# Altium PCB PCB1.PcbDoc
Units mil, origin at the board's own origin, x right, y up, seen from the top; angles counter-clockwise.
Board outline 6000 x 4000 mil, 2 copper layers (Top Layer, Bottom Layer); 17 components, 15 nets, 44 pads, 0 vias.
Unrouted connection lines stored in the file: 2.
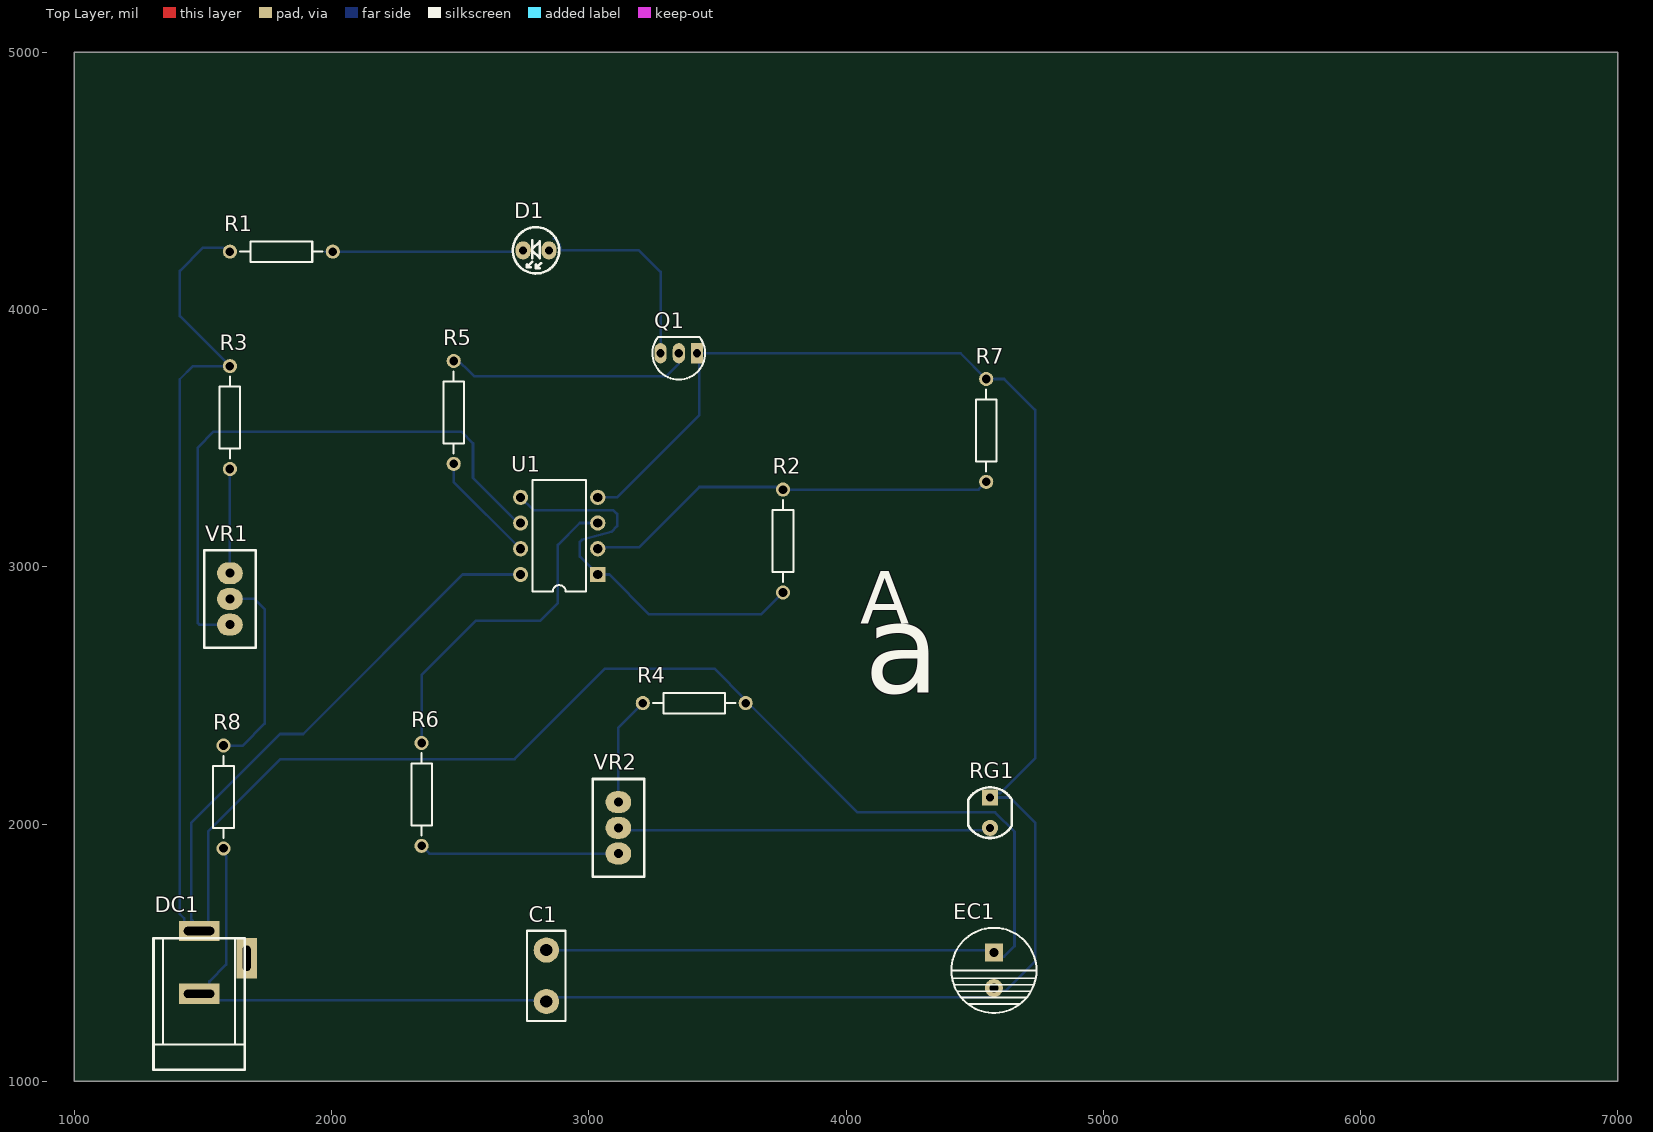
[diagram p0: Top Layer view]
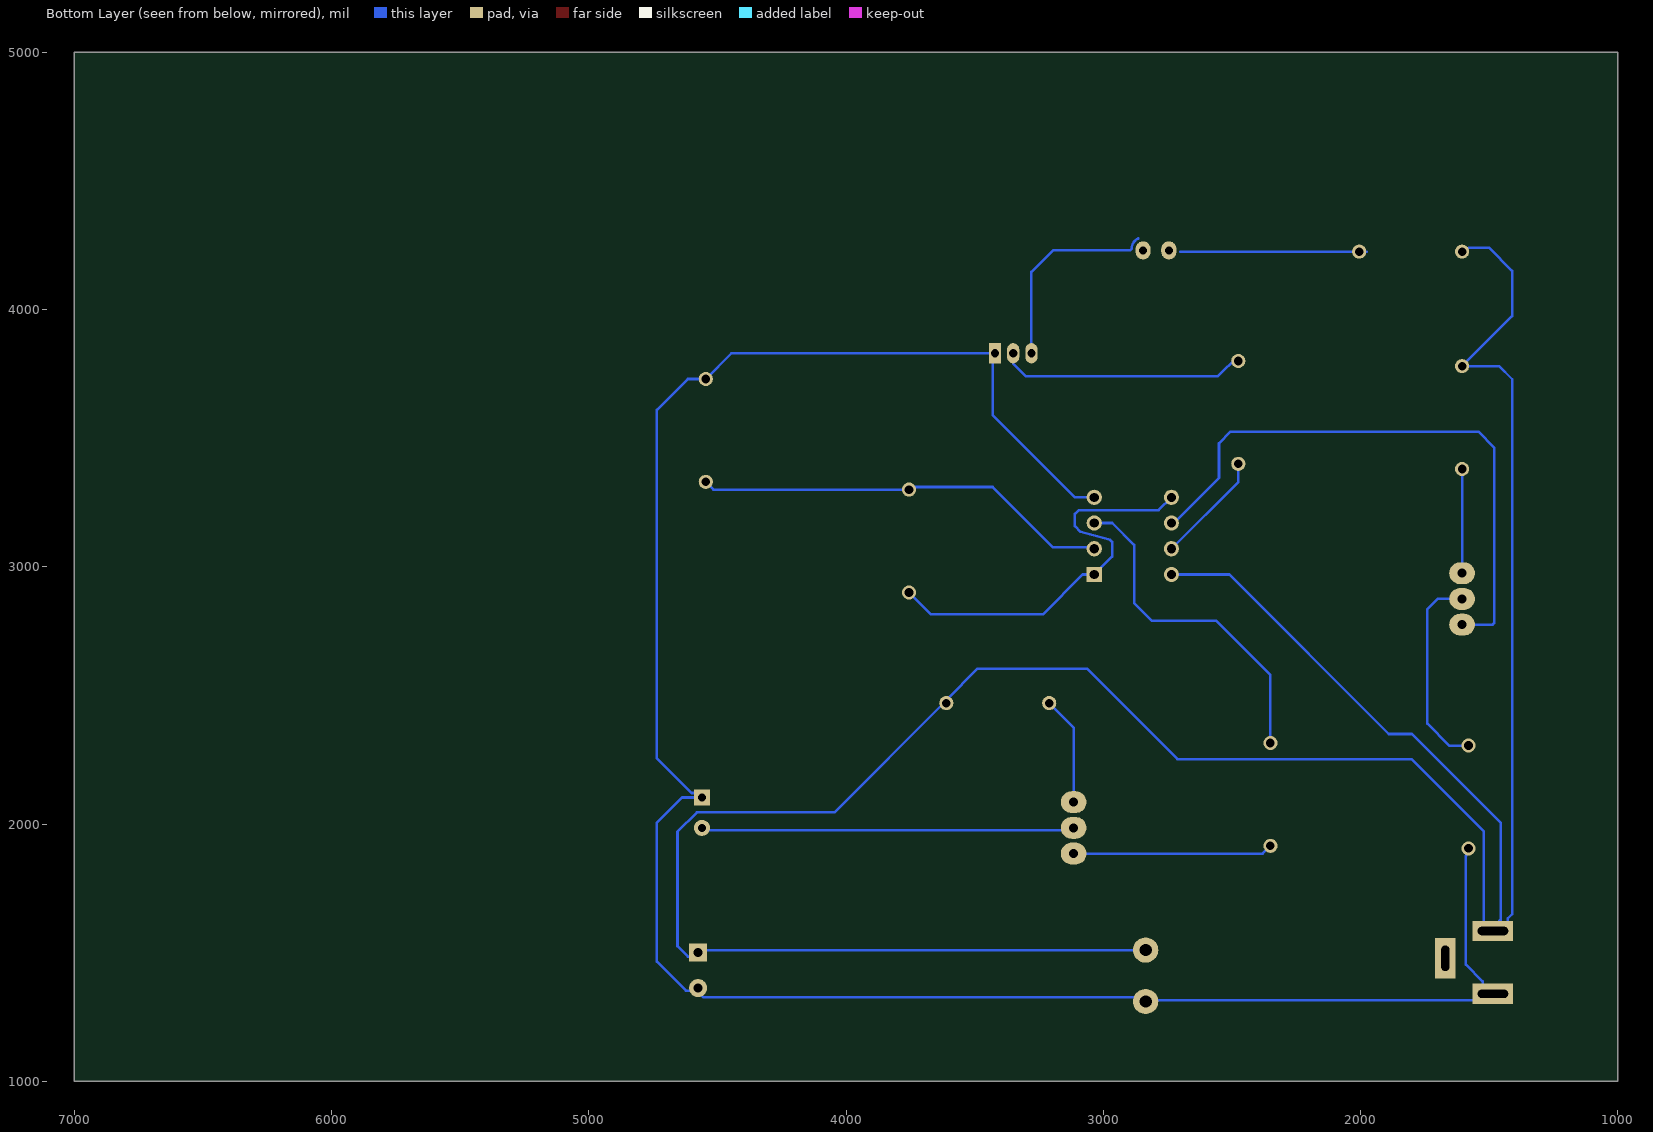
[diagram p1: Bottom Layer view, seen from below]
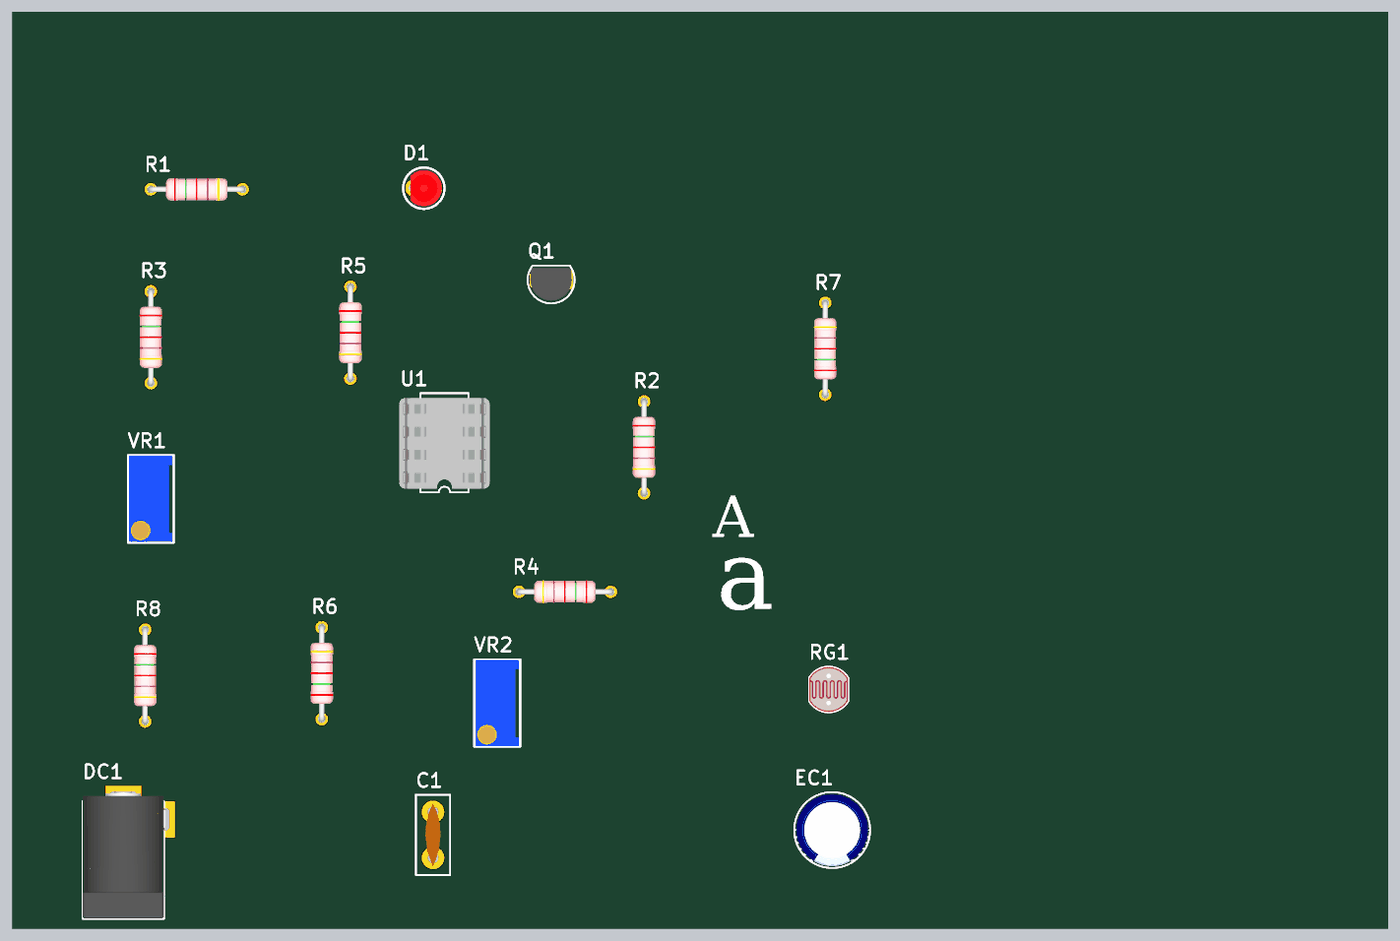
[diagram p2: 3D render of the assembled board from above, using the file's embedded part models]

## Layer stack, top to bottom
Top Solder: solder mask 0.4, Solder Resist, Dk 3.5
Top Layer: signal copper 1.4
Dielectric 1: dielectric 12.6, FR-4, Dk 4.8
Bottom Layer: signal copper 1.4
Bottom Solder: solder mask 0.4, Solder Resist, Dk 3.5

## Board outline
1000,1000 7000,1000 7000,5000 1000,5000

## Design rules (kind name [scope] priority, off if disabled: settings)
Clearance [All] p1: gap=10 ignorepadtopadclearanceinfootprint=FALSE except(0: Arc-Hole Track-Hole SMDPad-Hole THPad-Hole Via-Hole Fill-Hole Poly-Hole Region-Hole Text-Hole)
PolygonConnect [All] p1: connectstyle=Relief reliefconductorwidth=10 reliefentries=4 polygonreliefangle="90 Angle" airgapwidth=10
RoutingLayers RoutingLayers_1 [All] p1: top layer_v5=TRUE bottom layer_v5=TRUE
RoutingLayers RoutingOnly [All] p2: top layer_v5=FALSE bottom layer_v5=TRUE
RoutingVias [All] p1: holewidth=28 width=50 viastyle="Through Hole" minholewidth=28 minwidth=50 maxholewidth=28 maxwidth=50
SolderMaskExpansion [All] p1: expansion=4 istentingtop=FALSE
Width [All] p1: maxlimit=10 minlimit=10 preferedwidth=10
29 further rules are at their usual default settings.

## Components (designator, comment, footprint, x,y, rotation, side; value= is the part's Value field where it differs from the comment)
C1 "100nF" RAD-0.2 2835,1310 r90 top
D1 "LED-3528" LED3-RED 2845,4230 r180 top
DC1 "DC_Socket" DC-005 1485,1584.09 r270 top
EC1 "220uF/25V" DIP-EC3.5X8X11.5 4575,1500 r270 top
Q1 "S8050" TO-92A 3420.87,3830 r180 top
R1 "1K" AXIAL0.4 2135,4265 r180 top
R2 "10K" AXIAL0.4 3795,2770 r90 top
R3 "1K" AXIAL0.4 1645,3250 r90 top
R4 "1K" AXIAL0.4 3080,2430 r0 top
R5 "1K" AXIAL0.4 2515,3270 r90 top
R6 "10K" AXIAL0.4 2310,2445 r270 top
R7 "5.1K" AXIAL0.4 4505,3860 r270 top
R8 "1K" AXIAL0.4 1620,1775 r90 top
RG1 "5506" Photoresistor 4560,2103.11 r270 top
U1 "LM358P" P008 2885,3120 r90 top
VR1 "RESVR" 3296W 1605,2875 r270 top
VR2 "RESVR" 3296W 3115,1985 r270 top

## Footprints (in the part's own frame and the unit in brackets; to place one, negate y for a bottom-side part, rotate by r counter-clockwise, add the part's x,y. Pads: shape width x height; smd on the part's side, far side on the other; paste and mask are expansions set on the pad)
3296W [mil]
  oval 85x100 hole 35: 1(-100,0) 2(0,0) 3(100,0)
  silkscreen extent -190,-100 190,100, body extent -188,-94 188,94, height 455
AXIAL0.4 [mm] "1/4W/1/2W"
  round 1.4 hole 0.85: 1(3.302,1.016) 2(13.462,1.016)
  silkscreen extent 4.32,0 12.45,2.03, body extent 3,-0.24 13.76,2.28, height 2.63
DC-005 [mm] "5.5X2.1mm"
  rect 2x4 hole 0.8 slot 3 at 90 deg: 1(0,0) 2(6.2,0)
  rect 4x2 hole 0.8 slot 2.5 at 0 deg: 3(2.7,4.7)
  silkscreen extent 0.72,-4.5 13.7,4.5, body extent -0.4,-4.52 13.65,4.78, height 11.2
DIP-EC3.5X8X11.5 [mm]
  rect 1.8x1.8 hole 0.9: 1(0,0)
  round 1.8 hole 0.9: 2(3.5,0)
  silkscreen extent -2.45,-4.2 5.95,4.2, body extent -2.25,-4 5.75,4, height 11.53
LED3-RED [mm]
  oval 1.5x1.8 hole 0.8: A(0,0) K(2.54,0)
  silkscreen extent -1.02,-2.29 3.55,2.29, body extent -0.74,-2 2.78,1.99, height 5.2
P008 [mm] "DIP; 8 Leads; Row Spacing 7.62 mm; Pitch 2.54 mm"
  rect 1.5x1.5 hole 0.9: 1(-3.81,-3.81)
  round 1.5 hole 0.9: 2(-1.27,-3.81) 3(1.27,-3.81) 4(3.81,-3.81) 5(3.81,3.81) 6(1.27,3.81) 7(-1.27,3.81) 8(-3.81,3.81)
  silkscreen extent -5.5,-2.65 5.5,2.65, body extent -5.08,-5 4.95,5, height 5.08
Photoresistor [mm]
  rect 1.6x1.6 hole 0.8: 1(0,0)
  round 1.6 hole 0.8: 2(3,0)
  silkscreen extent -1,-2.16 4,2.16, body extent -1,-2.16 4,2.14, height 1.9
RAD-0.2 [mm]
  round 2.5 hole 1.2: 1(0,0) 2(5.08,0)
  silkscreen extent -1.91,-1.91 6.98,1.91, body extent -0.96,-0.85 6.04,0.85, height 7.06
TO-92A [mm]
  oval 1.2x2 hole 0.8: B(1.8,0) C(3.6,0)
  rect 1.2x2 hole 0.8: E(0,0)
  silkscreen extent -0.8,-1.6 4.4,2.6, body extent -0.5,-1.31 4.1,2.29, height 6.58

## Part data
C1: library part CAP, "无极性电容"
EC1: library part DIP_ECAP, "直插电解电容"
Q1: library part NPN, "NPN三极管"
R1 R2 R3 R4 R5 R6 R7 R8: library part RES
RG1: library part Photoresistor, "光敏电阻"
U1: "Dual Operational Amplifier", Code_JEDEC=MO-001-AN, ComponentLink1Description="Manufacturer Link", ComponentLink1URL=http://www.ti.com/, ComponentLink2Description=Datasheet, ComponentLink2URL=http://www-s.ti.com/sc/ds/lm358.pdf, DatasheetVersion=Jul-1998, LatestRevisionDate=04-Mar-2005, LatestRevisionNote="Stylized 3D Model Added.", PackageDescription="DIP; 8 Leads; Row Spacing 7.62 mm; Pitch 2.54 mm", PackageReference=P008, PackageVersion=Jun-1999, Published=16-Jan-2001, Publisher="Altium Limited"

## Nets (pads, with @x,y where several pads share a name; then routed paths per layer and width w, separated by ;. In a path a pad name is that pad's centre, name@x,y a point inside that pad or via, vN(x,y) a via of type N, cw(c..) or ccw(c..) an arc to the next point about the centre after c; other vN are vias at no path point)
+12V: C1.2 DC1.1 EC1.1 R1.2 R3.2 R4.2 U1.8 | length 11700
  Bottom Layer w10: DC1.1@1470,1565 DC1.1@1470,1590 ; R1.2 1592.79,4225 1577.23,4240.56 1500.56,4240.56 1410.56,4150.56 1410.56,3974.44 R3.2 1461,3780 1410,3729 1410,1650 1427.39,1632.61 1427.39,1618.46 1455.86,1590 DC1.1@1470,1590 ; U1.8 2510,2970 1890,2350 1800,2350 1455,2005 1455,1629.09 ; C1.2 4530,1510 4530.42,1509.58 4544.57,1509.58 4555.43,1498.72 4555.43,1484.58 4614.58,1484.58 4655,1525 4655,1970 4580,2045 4045,2045 3620,2470 R4.2 3610,2482.21 3488.21,2604 3064,2604 2712,2252 1802,2252 1520,1970 1520,1604.09 1500,1584.09 DC1.1@1470,1614.09 ; EC1.1@4565.43,1509.57 EC1.1 EC1.1@4577.5,1497.5 ; 1455,1629.09 DC1.1@1470,1614.09 ; 1455,1629.09 1455,1614.09 DC1.1@1470,1599.09 ; DC1.1@1470,1590 DC1.1@1470,1599.09 ; DC1.1@1470,1590 1475.91,1584.09 DC1.1 DC1.1@1470,1599.09 ; DC1.1@1470,1599.09 DC1.1@1470,1614.09
GND: C1.1 DC1.2 EC1.2 Q1.E R7.1 R8.1 RG1.1 U1.4 | length 8503
  Bottom Layer w10: R8.1 1588.63,1896.37 1588.63,1877.95 1590,1876.58 1590,1453 1525,1388 DC1.2@1525,1315 ; U1.4 3110,3270 3430,3590 3430,3820.87 Q1.E 4445,3830 R7.1 4615,3730 4735,3610 4735,2255 4600.64,2120.64 4586.5,2120.64 4583.11,2117.25 RG1.1@4583.11,2103.11 ; EC1.2@4560,1352.2 4622.2,1352.2 4735,1465 4735,2005 4636.89,2103.11 RG1.1@4583.11,2103.11 ; RG1.1 RG1.1@4583.11,2103.11 ; EC1.2@4565,1337.2 4555.1,1327.3 2852.3,1327.3 2840,1315 DC1.2@1525,1315 ; DC1.2@1500,1340 DC1.2@1525,1315 ; DC1.2@1500,1340 DC1.2 DC1.2@1500,1340 ; DC1.2@1500,1340 DC1.2@1525,1315
NetD1_A: D1.A R1.1 | length 1421
  Bottom Layer w10: 1974.91,4225 2700.47,4225 R1.1
NetD1_K: D1.K Q1.C | length 793.4
  Bottom Layer w10: 2863.83,4276.26 cw(c2845,4235.91) 2889.53,4235.7 2892.3,4232.93 2895.23,4230 3195,4230 3279.13,4145.87 Q1.C
NetQ1_B: Q1.B R5.2 | length 968.8
  Bottom Layer w10: R5.2@2475,3820 2555,3740 3300,3740 3350,3790 Q1.B
NetR2_1: R2.1 U1.1 U1.5 | length 1585.2
  Bottom Layer w10: U1.5 2785,3220 3095,3220 3110,3205 3110,3157.93 3087.95,3135.88 2972.81,3104.34 2965.46,3096.98 2965.46,3094.69 2965.46,3039.54 U1.1 3080,2970 3235,2815 3670,2815 R2.1
NetR2_2: R2.2 R7.2 U1.2 | length 1626
  Bottom Layer w10: U1.2 3041.49,3076.49 3196.49,3076.49 3430,3310 3732.79,3310 3742.79,3300 4515,3300 R7.2
NetR3_1: R3.1 VR1.1 | length 405
  Bottom Layer w10: VR1.1 R3.1
NetR4_1: R4.1 VR2.1 | length 424.4
  Bottom Layer w10: VR2.1 3115,2375 R4.1
NetR5_1: R5.1 U1.7 | length 457.7
  Bottom Layer w10: R5.1@2475,3420 2475,3330 U1.7
NetR6_1: R6.1 U1.3 | length 1326.2
  Bottom Layer w10: R6.1 2350,2580 2560,2790 2810,2790 2880,2860 2880,3085 2965,3170 U1.3
NetR6_2: R6.2 VR2.3 | length 777.4
  Bottom Layer w10: R6.2 2380,1885 VR2.3
NetR8_2: R8.2 VR1.2 | length 791.8
  Bottom Layer w10: R8.2 1655,2305 1740,2390 1740,2835 1700,2875 VR1.2
NetRG1_2: RG1.2 VR2.2 | length 1453.3
  Bottom Layer w10: VR2.2 3125,1975 4550,1975 RG1.2
NetU1_6: U1.6 VR1.3 | length 2316.4
  Bottom Layer w10: VR1.3 1485.86,2775 1480,2780.86 1480,3463 1542,3525 2505,3525 2550,3480 2550,3345 2725,3170 U1.6
pads on no net: DC1.3

## Silkscreen, mask and mechanical layers (free items; w line width, h text height)
Top Overlay:
  text "A" at 4055,2710 h350
  text "a" at 4070,2395 h600